# EAGLE board Felderblock6-a-1 (EAGLE 9.6.2)
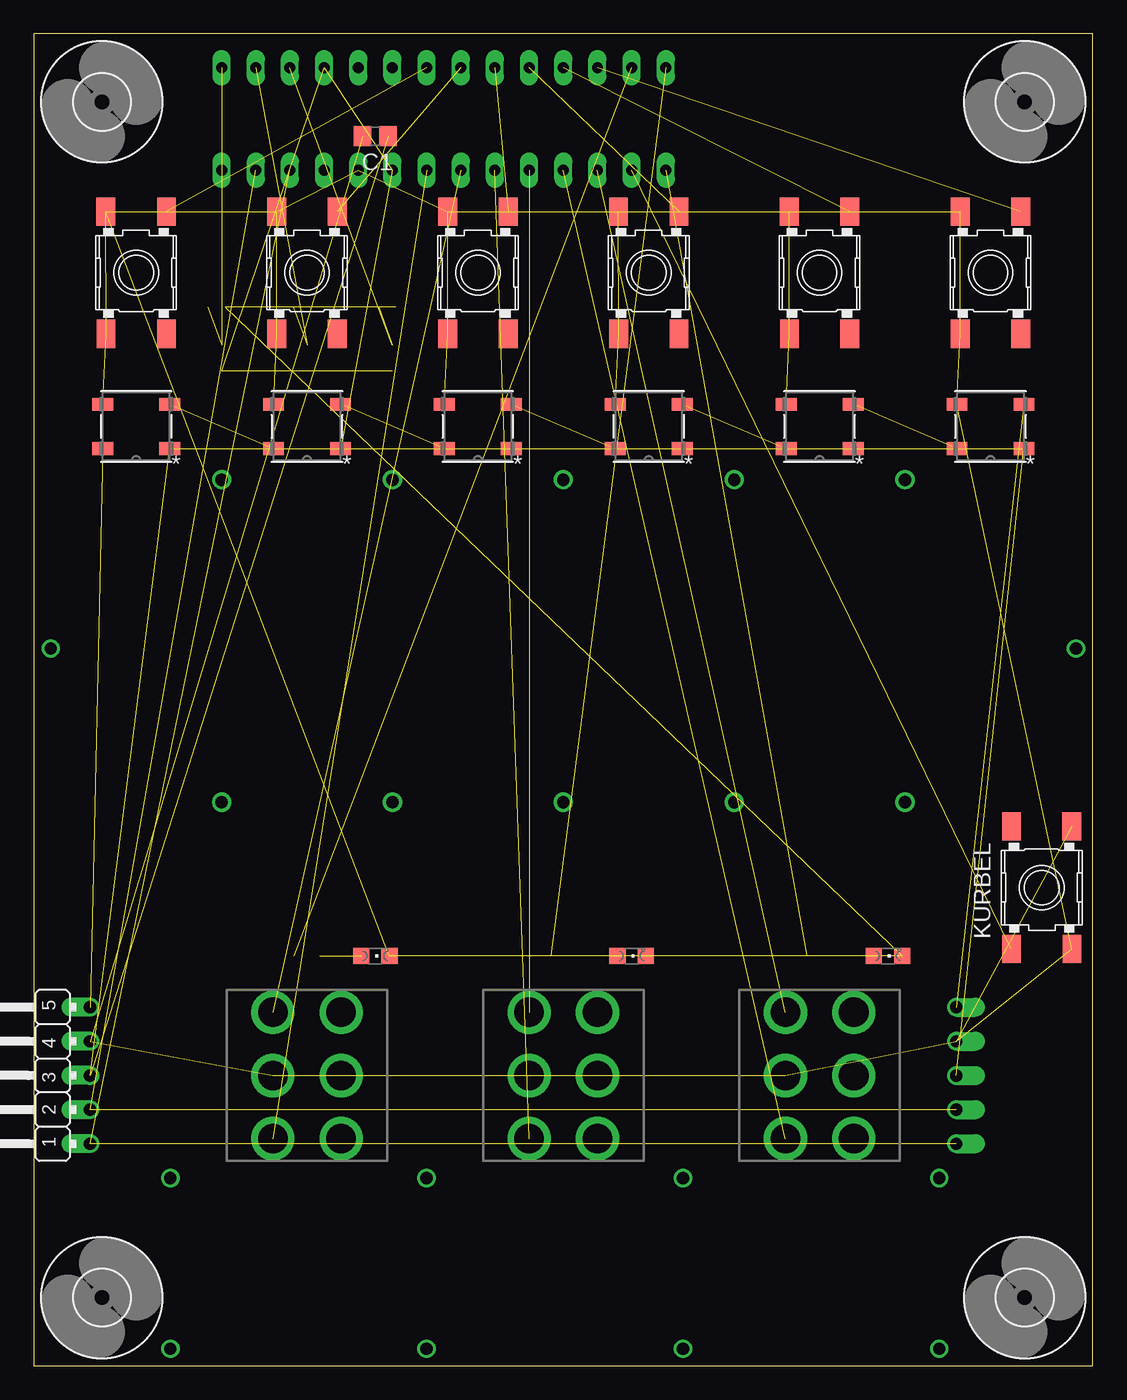
[diagram p0: board, top side]
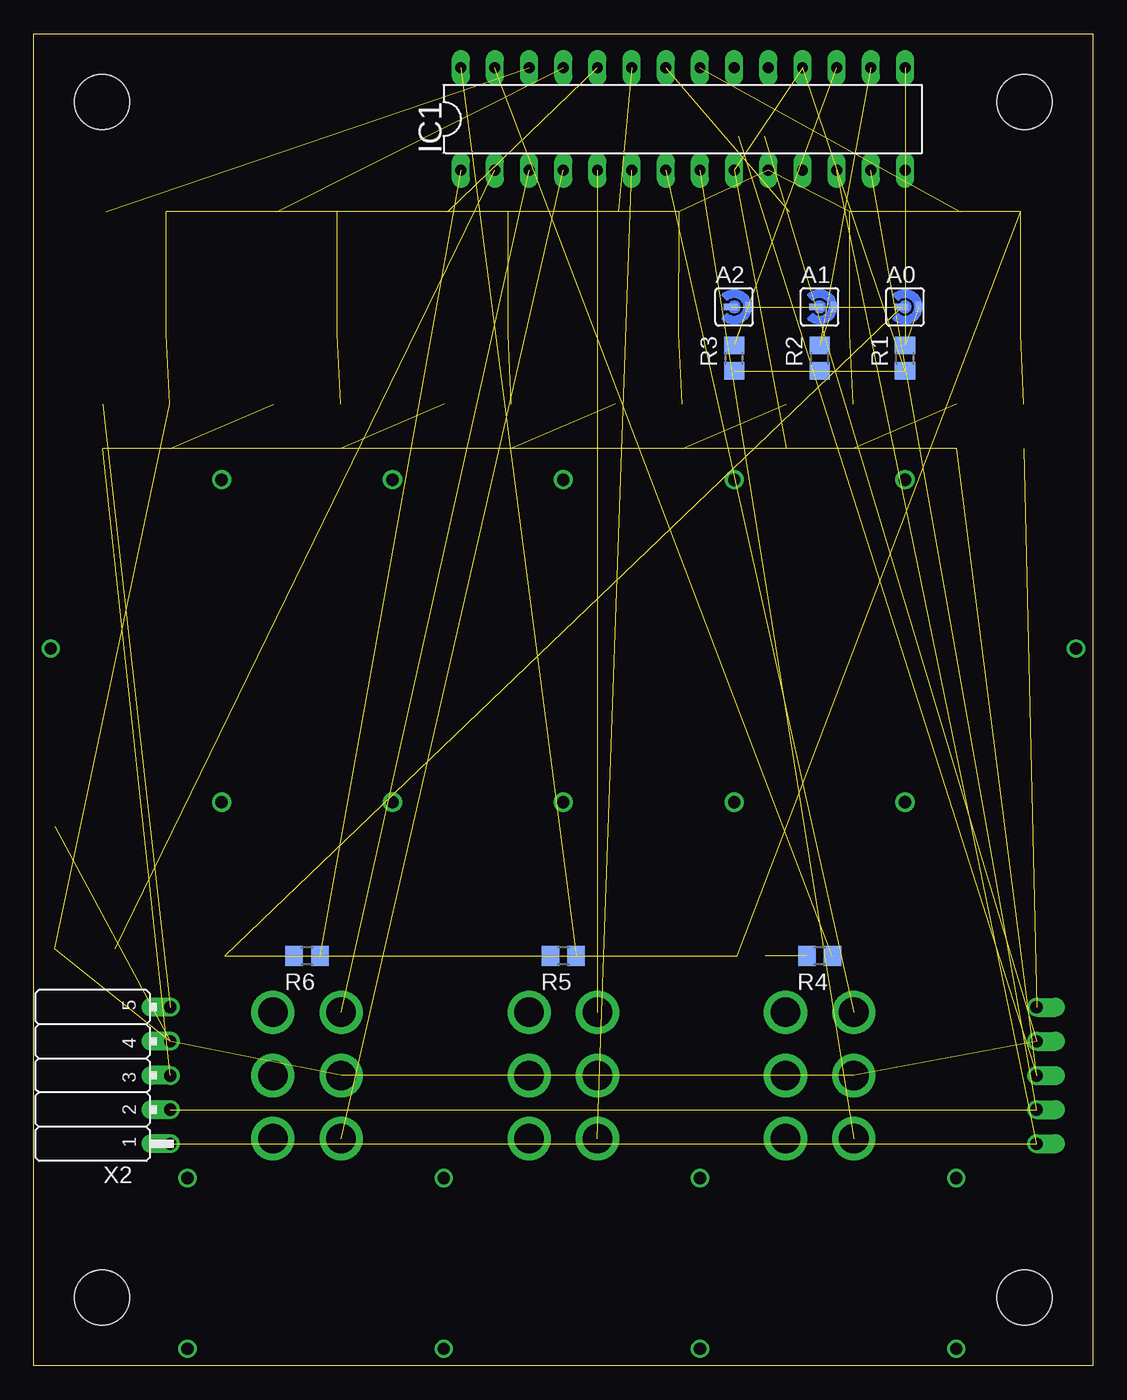
[diagram p1: board, bottom side, seen from below]

Size 78.74 x 99.06 mm. Coordinates in mm from the lower left corner, seen from the top.
Outline: 0,0 78.74,0 78.74,99.06 0,99.06 0,0
Copper layers (1*16): Top 0.035mm / dielectric 1.5mm / Bottom 0.035mm
Design rules "SeeedStudio_2layer_DRU_no_angle_20140221": minimum track width 6mil, minimum drill 12mil, track to track 6mil, track to pad 6mil, pad to pad 6mil, via to via 6mil, smd to smd 0mil, copper to edge 10mil, drill to drill 10mil, minimum pad ring 10mil, minimum via ring 6mil, stop-mask expansion 2mil, vias tented up to drill 100mil, thermal gap 10mil
Net classes: 0 default: width 0.254 mm, clearance 0.254 mm

## Footprints (pad centres in the part's own frame; a part is rotated, then mirrored left to right if it is on the bottom)
SJ_RND2 = smd 1.016 x 0.508: P$1 -0.254,0 | smd 0.406 x 0.813: P$2 1.016,0
C0805 = smd 1.3 x 1.5: 1 -0.95,0; 2 0.95,0
4,1 = hole 4.1: 0,0
DIL28-3 = drill 0.813 long: 1 -16.51,-3.81; 2 -13.97,-3.81; 3 -11.43,-3.81; 4 -8.89,-3.81; 5 -6.35,-3.81; 6 -3.81,-3.81; 7 -1.27,-3.81; 8 1.27,-3.81; 9 3.81,-3.81; 10 6.35,-3.81; 11 8.89,-3.81; 12 11.43,-3.81; 13 13.97,-3.81; 14 16.51,-3.81; 15 16.51,3.81; 16 13.97,3.81; 17 11.43,3.81; 18 8.89,3.81; 19 6.35,3.81; 20 3.81,3.81; 21 1.27,3.81; 22 -1.27,3.81; 23 -3.81,3.81; 24 -6.35,3.81; 25 -8.89,3.81; 26 -11.43,3.81; 27 -13.97,3.81; 28 -16.51,3.81
FELD-BOARD-HOLDER = drill 0.914: 1 0,0; 2 0,23.978
TACTSW-6X6 = smd 2.1 x 1.4: 1 -4.55,2.24; 2 4.55,2.25; 3 -4.55,-2.25; 4 4.55,-2.25
COM-16347_SPK-M = smd 1.549 x 0.94: 1 -2.489,1.65; 2 -2.489,-1.65; 3 2.489,-1.65; 4 2.489,1.65
CHIPLED_0805 = smd 1.2 x 1.2: A 0,-1.05; C 0,1.05
R0805 = smd 1.3 x 1.5: 1 -0.95,0; 2 0.95,0
DP-T1 = drill 2.2 pad 3.2: 1 -4.699,2.54; 2 0,2.54; 3 4.699,2.54; 4 -4.699,-2.54; 5 0,-2.54; 6 4.699,-2.54
JP5F = drill 0.914 offset: 1 -5.08,0; 2 -2.54,0; 3 0,0; 4 2.54,0; 5 5.08,0
JP5F-FEM = drill 0.914 offset: 1 -5.08,0; 2 -2.54,0; 3 0,0; 4 2.54,0; 5 5.08,0

## Placement (x,y rotation side)
A0  [SJ_RND2]  13.97,78.74 0 bottom
A1  [SJ_RND2]  20.32,78.74 0 bottom
A2  [SJ_RND2]  26.67,78.74 0 bottom
C1  [C0805]  25.4,91.44 180 top
H1  MOUNT-HOLE4.1  [4,1]  73.66,5.08 0 top
H2  MOUNT-HOLE4.1  [4,1]  5.08,5.08 0 top
H3  MOUNT-HOLE4.1  [4,1]  73.66,93.98 0 top
H4  MOUNT-HOLE4.1  [4,1]  5.08,93.98 0 top
IC1  MCP23017SP  [DIL28-3]  30.48,92.71 0 bottom
JP1  [FELD-BOARD-HOLDER]  13.97,41.91 0 top
JP2  [FELD-BOARD-HOLDER]  26.67,41.91 0 top
JP3  [FELD-BOARD-HOLDER]  64.77,41.91 0 top
JP4  [FELD-BOARD-HOLDER]  52.07,41.91 0 top
JP5  [FELD-BOARD-HOLDER]  39.37,41.91 0 top
KURBEL  W1  [TACTSW-6X6]  74.93,35.56 270 top
LED1  [COM-16347_SPK-M]  7.62,69.85 180 top
LED2  [COM-16347_SPK-M]  20.32,69.85 180 top
LED3  [COM-16347_SPK-M]  33.02,69.85 180 top
LED4  [COM-16347_SPK-M]  45.72,69.85 180 top
LED5  [COM-16347_SPK-M]  58.42,69.85 180 top
LED6  [COM-16347_SPK-M]  71.12,69.85 180 top
LED7  [CHIPLED_0805]  25.4,30.48 270 top
LED8  [CHIPLED_0805]  44.45,30.48 270 top
LED9  [CHIPLED_0805]  63.5,30.48 270 top
R1  47k  [R0805]  13.97,74.93 90 bottom
R2  47k  [R0805]  20.32,74.93 90 bottom
R3  47k  [R0805]  26.67,74.93 90 bottom
R4  330  [R0805]  20.32,30.48 180 bottom
R5  330  [R0805]  39.37,30.48 180 bottom
R6  330  [R0805]  58.42,30.48 180 bottom
S1  W1  [TACTSW-6X6]  7.62,81.28 90 top
S2  W1  [TACTSW-6X6]  20.32,81.28 90 top
S3  W1  [TACTSW-6X6]  33.02,81.28 90 top
S4  W1  [TACTSW-6X6]  45.72,81.28 90 top
S5  W1  [TACTSW-6X6]  58.42,81.28 90 top
S6  W1  [TACTSW-6X6]  71.12,81.28 90 top
S8  [DP-T1]  20.32,21.59 90 top
S9  [DP-T1]  39.37,21.59 90 top
S10  [DP-T1]  58.42,21.59 90 top
X1  JP5-FLAT  [JP5F]  4.19,21.59 90 top
X2  JP5-FLATFEMALE  [JP5F-FEM]  68.58,21.59 90 bottom

## Library data of the parts
A0 A1 A2 JP1-JP5 S8-S10 X1 X2 = eagleparts
C1 = rcl; SPICEPREFIX: C
H1-H4 = holes
IC1 = microchip; MF: MICROCHIP; MPN: MCP23017-E/SP; OC_FARNELL: 1332088; OC_NEWARK: 31K2959
KURBEL S1-S6 = g-e2e-training
LED1-LED6 = eagleparts; COPYRIGHT: Copyright (C) 2024 Ultra Librarian. All rights reserved.; MANUFACTURER_PART_NUMBER: COM-16347; MFR_NAME: Sparkfun; TYPE: LED Addressable
LED7-LED9 = led
R1-R6 = rcl; SPICEPREFIX: R

## Nets
+5V: C1.1 IC1.9 IC1.18 LED1.1 LED2.1 LED3.1 LED4.1 LED5.1 LED6.1 R1.1 R2.1 R3.1 X1.3 X2.3
GND: A0.P$1 A1.P$1 A2.P$1 C1.2 IC1.10 KURBEL.1 KURBEL.2 LED1.3 LED2.3 LED3.3 LED4.3 LED5.3 LED6.3 LED7.C LED8.C LED9.C S1.1 S1.2 S2.1 S2.2 S3.1 S3.2 S4.1 S4.2 S5.1 S5.2 S6.1 S6.2 S8.2 S9.2 S10.2 X1.4 X2.4
I2CSCL: IC1.12 X1.1 X2.1
I2CSDA: IC1.13 X1.2 X2.2
LED_DAT: LED1.4 X1.5
LED_OUT: LED6.2 X2.5
LEDF1: IC1.27 R4.1
LEDF2: IC1.28 R5.1
LEDF3: IC1.1 R6.1
N$1: A0.P$2 IC1.15 R1.2
N$2: A1.P$2 IC1.16 R2.2
N$3: A2.P$2 IC1.17 R3.2
N$4: IC1.21 S1.4
N$5: IC1.22 S2.4
N$6: IC1.23 S3.4
N$7: IC1.24 S4.4
N$8: IC1.25 S5.4
N$9: IC1.26 S6.4
N$10: IC1.8 S8.1
N$11: IC1.7 S8.3
N$12: LED1.2 LED2.4
N$13: LED2.2 LED3.4
N$14: LED3.2 LED4.4
N$15: LED4.2 LED5.4
N$16: LED5.2 LED6.4
N$17: IC1.6 S9.1
N$18: IC1.5 S9.3
N$19: IC1.4 S10.1
N$20: IC1.3 S10.3
N$21: LED8.A R5.2
N$22: LED7.A R4.2
N$23: LED9.A R6.2
N$24: IC1.2 KURBEL.4

## Tracks (layer width: path | path; a pad name or v marks a point on that pad's centre or on a via)
+5V  (13 unrouted)
GND  (32 unrouted)
I2CSCL  (2 unrouted)
I2CSDA  (2 unrouted)
LED_DAT  (1 unrouted)
LED_OUT  (1 unrouted)
LEDF1  (1 unrouted)
LEDF2  (1 unrouted)
LEDF3  (1 unrouted)
N$1  (2 unrouted)
N$2  (2 unrouted)
N$3  (2 unrouted)
N$4  (1 unrouted)
N$5  (1 unrouted)
N$6  (1 unrouted)
N$7  (1 unrouted)
N$8  (1 unrouted)
N$9  (1 unrouted)
N$10  (1 unrouted)
N$11  (1 unrouted)
N$12  (1 unrouted)
N$13  (1 unrouted)
N$14  (1 unrouted)
N$15  (1 unrouted)
N$16  (1 unrouted)
N$17  (1 unrouted)
N$18  (1 unrouted)
N$19  (1 unrouted)
N$20  (1 unrouted)
N$21  (1 unrouted)
N$22  (1 unrouted)
N$23  (1 unrouted)
N$24  (1 unrouted)
N$25  (via drill 0.91)
  other vias: 77.47,53.34
N$26  (via drill 0.91)
  other vias: 1.27,53.34
N$27  (via drill 0.91)
  other vias: 29.21,13.97
N$28  (via drill 0.91)
  other vias: 48.26,13.97
N$29  (via drill 0.91)
  other vias: 67.31,13.97
N$30  (via drill 0.91)
  other vias: 10.16,13.97
N$31  (via drill 0.91)
  other vias: 10.16,1.27
N$32  (via drill 0.91)
  other vias: 29.21,1.27
N$33  (via drill 0.91)
  other vias: 48.26,1.27
N$34  (via drill 0.91)
  other vias: 67.31,1.27